# EAGLE board driverMotor (EAGLE 9.6.2)
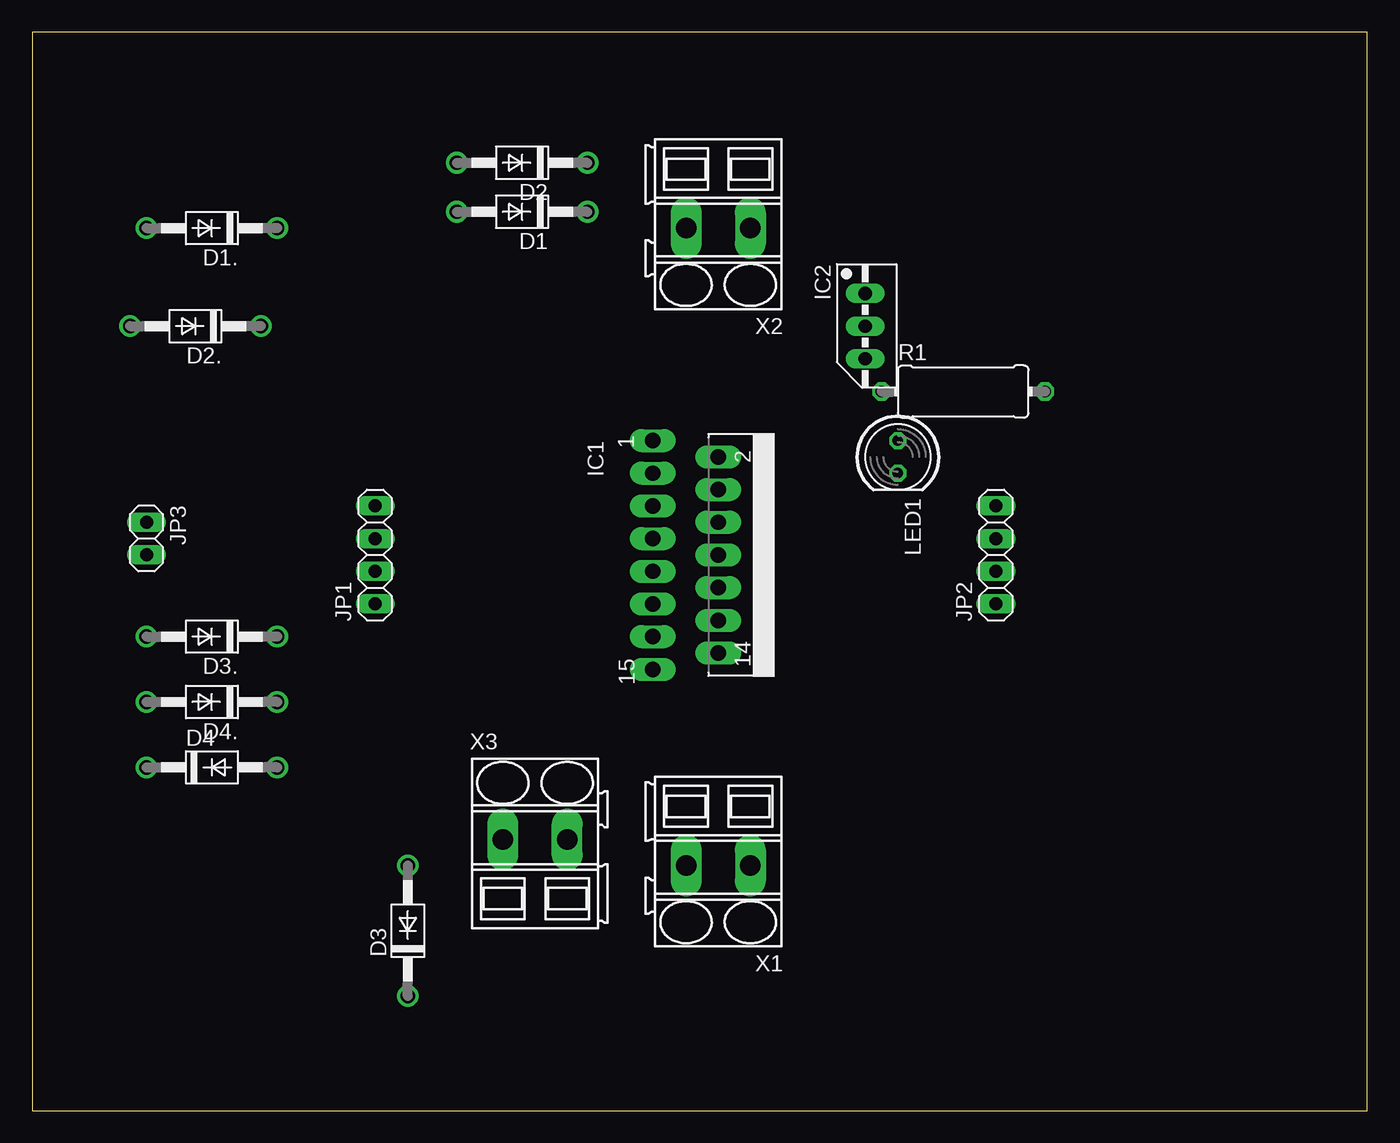
[diagram p0: board, top side]
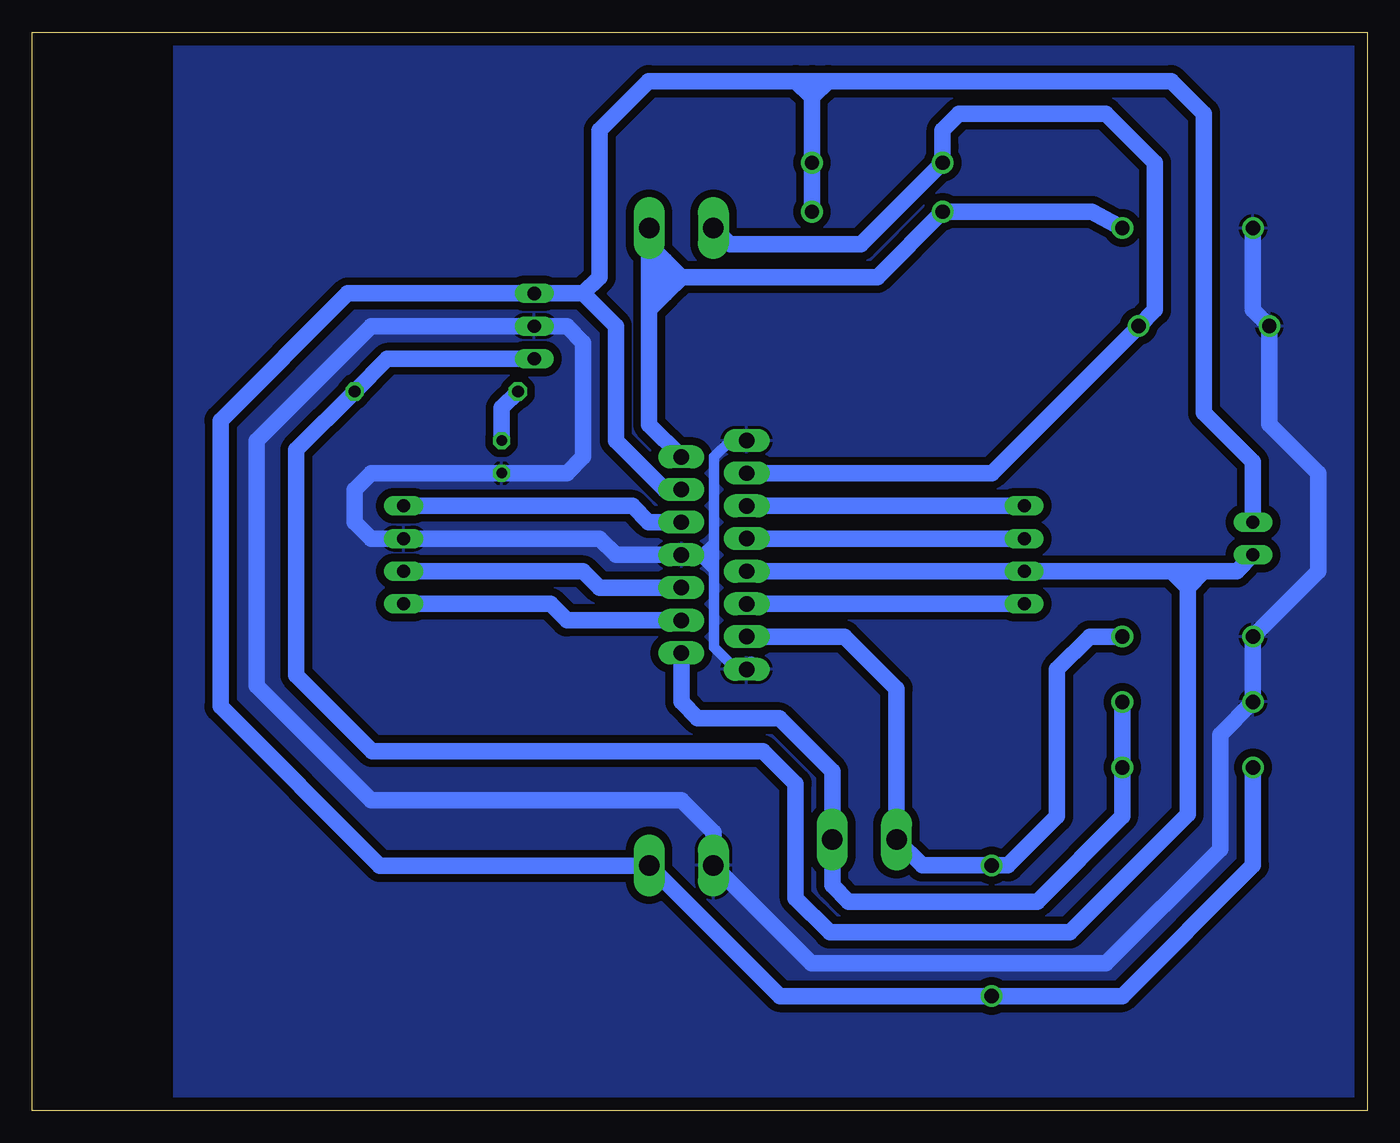
[diagram p1: board, bottom side, seen from below]

Size 103.81 x 83.81 mm. Coordinates in mm from the lower left corner, seen from the top.
Outline: 0,0 103.81,0 103.81,83.81 0,83.81 0,0
Copper layers (1*16): Top 0.035mm / dielectric 1.5mm / Bottom 0.035mm
Design rules "default": minimum track width 6mil, minimum drill 0.35mm, track to track 6mil, track to pad 6mil, pad to pad 6mil, via to via 6mil, smd to smd 6mil, copper to edge 40mil, drill to drill 6mil, minimum pad ring 10mil, minimum via ring 8mil, stop-mask expansion 4mil, vias tented up to drill 0mil, thermal gap 10mil

## Footprints (pad centres in the part's own frame; a part is rotated, then mirrored left to right if it is on the bottom)
DO41-10 = drill 1.118: A 5.08,0; C -5.08,0
MULTIWATT-15 = drill 1.2 long: 1 -8.89,-7.62; 2 -7.62,-2.54; 3 -6.35,-7.62; 4 -5.08,-2.54; 5 -3.81,-7.62; 6 -2.54,-2.54; 7 -1.27,-7.62; 8 0,-2.54; 9 1.27,-7.62; 10 2.54,-2.54; 11 3.81,-7.62; 12 5.08,-2.54; 13 6.35,-7.62; 14 7.62,-2.54; 15 8.89,-7.62
78MXXS = drill 1.016 long: GND 0,-2.54; IN -2.54,-2.54; OUT 2.54,-2.54
1X04 = drill 1.016 long: 1 -3.81,0; 2 -1.27,0; 3 1.27,0; 4 3.81,0
1X02 = drill 1.016 long: 1 -1.27,0; 2 1.27,0
LED5MM = drill 0.813 octagon: A -1.27,0; K 1.27,0
0411/12 = drill 0.914 octagon: 1 -6.35,0; 2 6.35,0
SMKDSP_1,5/2 = drill 1.6 pad 1.8 long: 1 -2.5,0; 2 2.5,0

## Placement (x,y rotation side)
D1  1N4004  [DO41-10]  38.1,69.85 180 top
D1.  1N4004  [DO41-10]  13.97,68.58 180 top
D2  1N4004  [DO41-10]  38.1,73.66 180 top
D2.  1N4004  [DO41-10]  12.7,60.96 180 top
D3  1N4004  [DO41-10]  29.21,13.97 90 top
D3.  1N4004  [DO41-10]  13.97,36.83 180 top
D4  1N4004  [DO41-10]  13.97,26.67 0 top
D4.  1N4004  [DO41-10]  13.97,31.75 180 top
IC1  L298  [MULTIWATT-15]  55.88,43.18 270 top
IC2  [78MXXS]  67.31,60.96 270 top
JP1  [1X04]  26.67,43.18 90 top
JP2  [1X04]  74.93,43.18 90 top
JP3  [1X02]  8.89,44.45 270 top
LED1  [LED5MM]  67.31,50.8 270 top
R1  [0411/12]  72.39,55.88 0 top
X1  SMKDSP_1,5/2  [SMKDSP_1,5/2]  53.34,19.05 180 top
X2  SMKDSP_1,5/2  [SMKDSP_1,5/2]  53.34,68.58 180 top
X3  SMKDSP_1,5/2  [SMKDSP_1,5/2]  39.1,21.05 0 top

## Library data of the parts
D1 D1. D2 D2. D3 D3. D4 D4. = diode
IC1 = st-microelectronics
IC2 = v-reg
JP1-JP3 = pinhead
LED1 = led
R1 = resistor
X1-X3 = con-phoenix-smkdsp; MF: FARNELL; MPN: 1733570; OC_FARNELL: 3041244; OC_NEWARK: 69C8588

## Nets
+5V: IC1.9 IC2.OUT JP1.2 JP3.2 R1.2
ENABLE_A: IC1.6 JP2.4
ENABLE_B: IC1.11 JP1.1
GND: D1..A D2..A D3..A D4..A IC1.1 IC1.8 IC1.15 IC2.GND JP2.3 LED1.K X1.2
INPUT1: IC1.5 JP1.4
INPUT2: IC1.7 JP1.3
INPUT3: IC1.10 JP2.2
INPUT4: IC1.12 JP2.1
LED: LED1.A R1.1
MOTOR1_1: D1..C D1.A IC1.2 X2.1
MOTOR1_2: D2..C D2.A IC1.3 X2.2
MOTOR2_1: D3..C D3.A IC1.13 X3.1
MOTOR2_2: D4..C D4.A IC1.14 X3.2
VS: D1.C D2.C D3.C D4.C IC1.4 IC2.IN JP3.1 X1.1

## Tracks (layer width: path | path; a pad name or v marks a point on that pad's centre or on a via)
+5V
  Bottom 1.27: 15.24,41.91 JP1.2 IC1.9 | 15.24,41.91 13.97,41.91 | 13.97,41.91 12.7,41.91 | 12.7,41.91 10.16,41.91 JP3.2 | 13.97,40.64 13.97,23.01 23.13,13.85 41.79,13.85 44.45,16.51 44.45,25.4 46.99,27.94 77.39,27.94 83.28,33.83 83.28,51.34 R1.2 76.2,58.42 IC2.OUT | 13.97,41.91 13.97,40.64 | 13.97,40.64 12.7,41.91 | 13.97,40.64 15.24,41.91
ENABLE_A
  Bottom 1.27: IC1.6 55.88,45.72 57.15,46.99 JP2.4
ENABLE_B
  Bottom 1.27: JP1.1 IC1.11
GND
  Bottom 0.406: 50.8,50.8 50.8,44.45 | IC1.8 52.07,43.18 50.8,44.45 | 50.8,44.45 50.8,44
  Bottom 0.813: IC1.1 49.53,52.07 50.8,50.8 50.8,44 | 50.8,44 50.8,43 | 50.8,43 50.8,42 | 50.8,42 50.8,36 49.09,34.29 IC1.15 | 50.8,43 50.81,43 | 50.81,43 51.81,43 | 51.81,43 53.16,43 IC1.8 51.62,43.18 50.81,43.99 | 50.8,42 50.81,42 51.81,43 | 50.8,44 50.81,43.99 | 50.81,43.99 50.81,43
  Bottom 1.27: IC1.15 47.9,34.65 | IC1.8 58.42,43.18 59.69,44.45 JP2.3 77.47,44.45 78.74,45.72 78.74,48.26 77.47,49.53 LED1.K 62.23,49.53 60.96,50.8 60.96,59.69 62.23,60.96 IC2.GND 77.47,60.96 86.36,52.07 86.36,33.02 77.47,24.13 53.34,24.13 50.84,21.63 X1.2 43.22,11.43 20.32,11.43 11.43,20.32 11.43,29.21 D4..A D3..A 3.81,41.91 3.81,49.53 7.62,53.34 D2..A 8.89,62.23 D1..A
  pour Bottom (isolate 0.61): 0.81,84 92.81,84 92.81,0 0.81,0
INPUT1
  Bottom 1.27: JP1.4 IC1.5
INPUT2
  Bottom 1.27: JP1.3 IC1.7
INPUT3
  Bottom 1.27: JP2.2 60.96,41.91 59.69,40.64 IC1.10
INPUT4
  Bottom 1.27: JP2.1 63.5,39.37 62.23,38.1 IC1.12
LED
  Bottom 1.27: R1.1 67.31,54.61 LED1.A
MOTOR1_1
  Bottom 1.27: D1..C 21.41,69.85 D1.A 38.1,64.77 53.34,64.77 | 54.61,66.04 55.84,67.27 X2.1 55.84,64.77 | 54.61,66.04 53.34,64.77 | 55.84,64.77 55.84,62.23 | 55.84,62.23 55.84,53.3 IC1.2 | 53.34,64.77 53.34,64.73 54.59,63.48 | 54.59,63.48 55.84,62.23 | 53.34,64.77 55.84,64.77 | 54.61,66.04 54.61,63.5 54.59,63.48
MOTOR1_2
  Bottom 1.27: X2.2 49.57,67.31 39.37,67.31 D2.A 33.02,74.93 33.02,76.2 31.75,77.47 20.32,77.47 16.51,73.66 16.51,62.23 D2..C 29.21,49.53 IC1.3
MOTOR2_1
  Bottom 1.27: IC1.13 40.64,36.83 36.6,32.79 X3.1 34.6,19.05 D3.A 27.94,19.05 24.13,22.86 24.13,34.29 21.59,36.83 D3..C
MOTOR2_2
  Bottom 1.27: D4..C D4.A 19.05,22.86 25.67,16.24 40.33,16.24 41.6,17.51 X3.2 41.6,26.36 45.72,30.48 52.07,30.48 53.34,31.75 IC1.14
VS
  Bottom 1.27: D1.C D2.C 43.18,78.74 | IC1.4 54.61,48.26 58.42,52.07 58.42,60.96 60.96,63.5 | 60.96,63.5 IC2.IN 79.28,63.5 89.17,53.61 89.17,31.4 76.78,19.01 55.88,19.01 X1.1 45.68,8.89 D3.C 19.05,8.89 8.89,19.05 D4.C | 44.45,80.01 55.88,80.01 59.69,76.2 59.69,64.77 60.96,63.5 | 44.45,80.01 43.18,80.01 | 43.18,80.01 41.91,80.01 | 41.91,80.01 15.24,80.01 12.7,77.47 12.7,54.22 8.89,50.41 JP3.1 | 43.18,80.01 43.18,78.74 | 41.91,80.01 43.18,78.74 | 43.18,78.74 44.45,80.01